# EAGLE board tempDAQ (EAGLE 8.3.0)
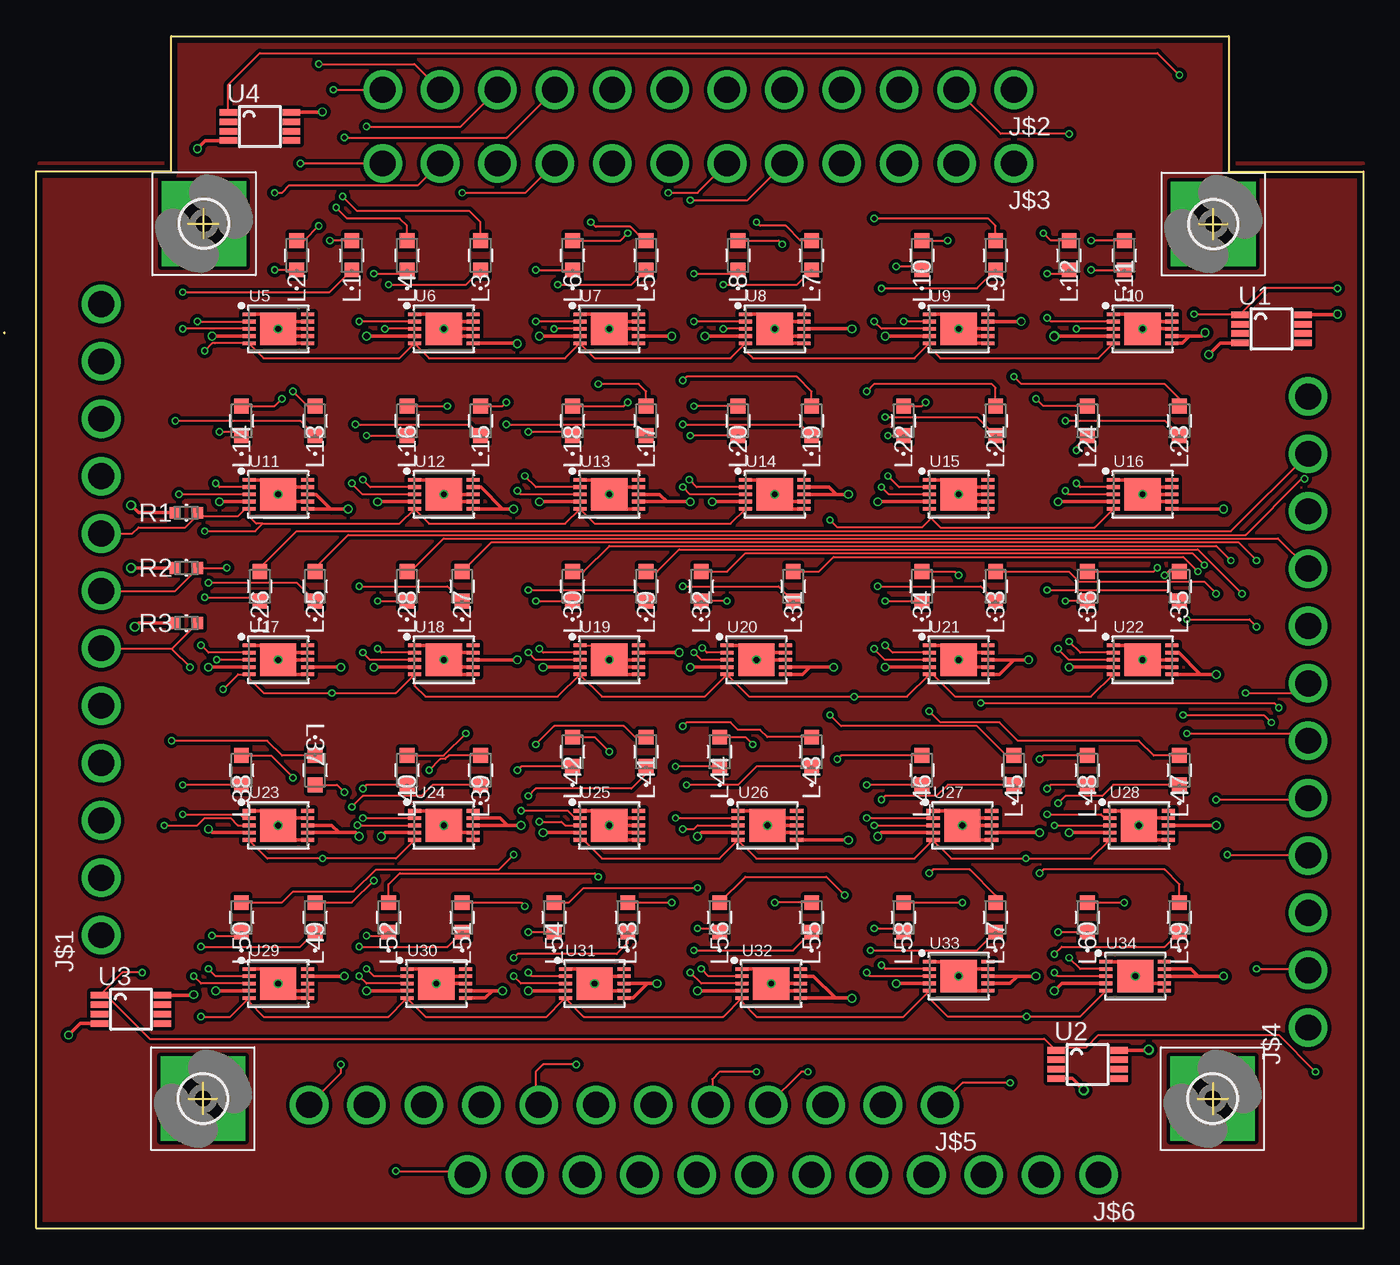
[diagram p0: board, top side]
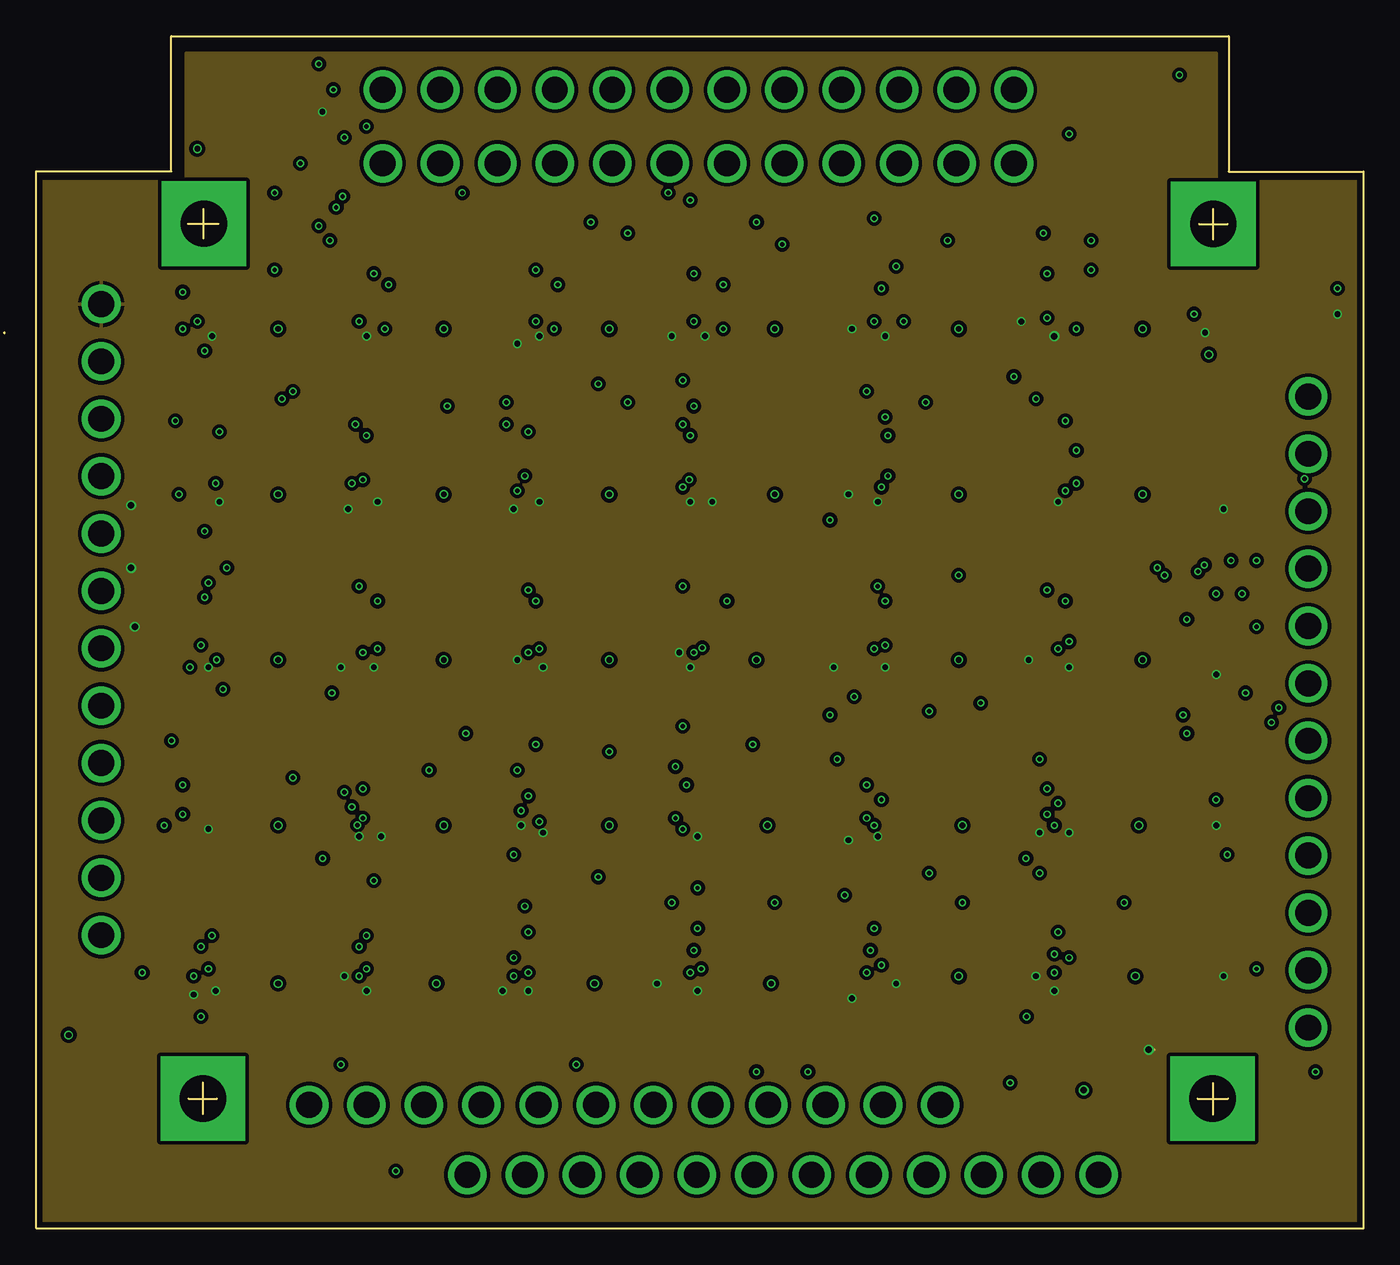
[diagram p1: board, inner layer Route2]
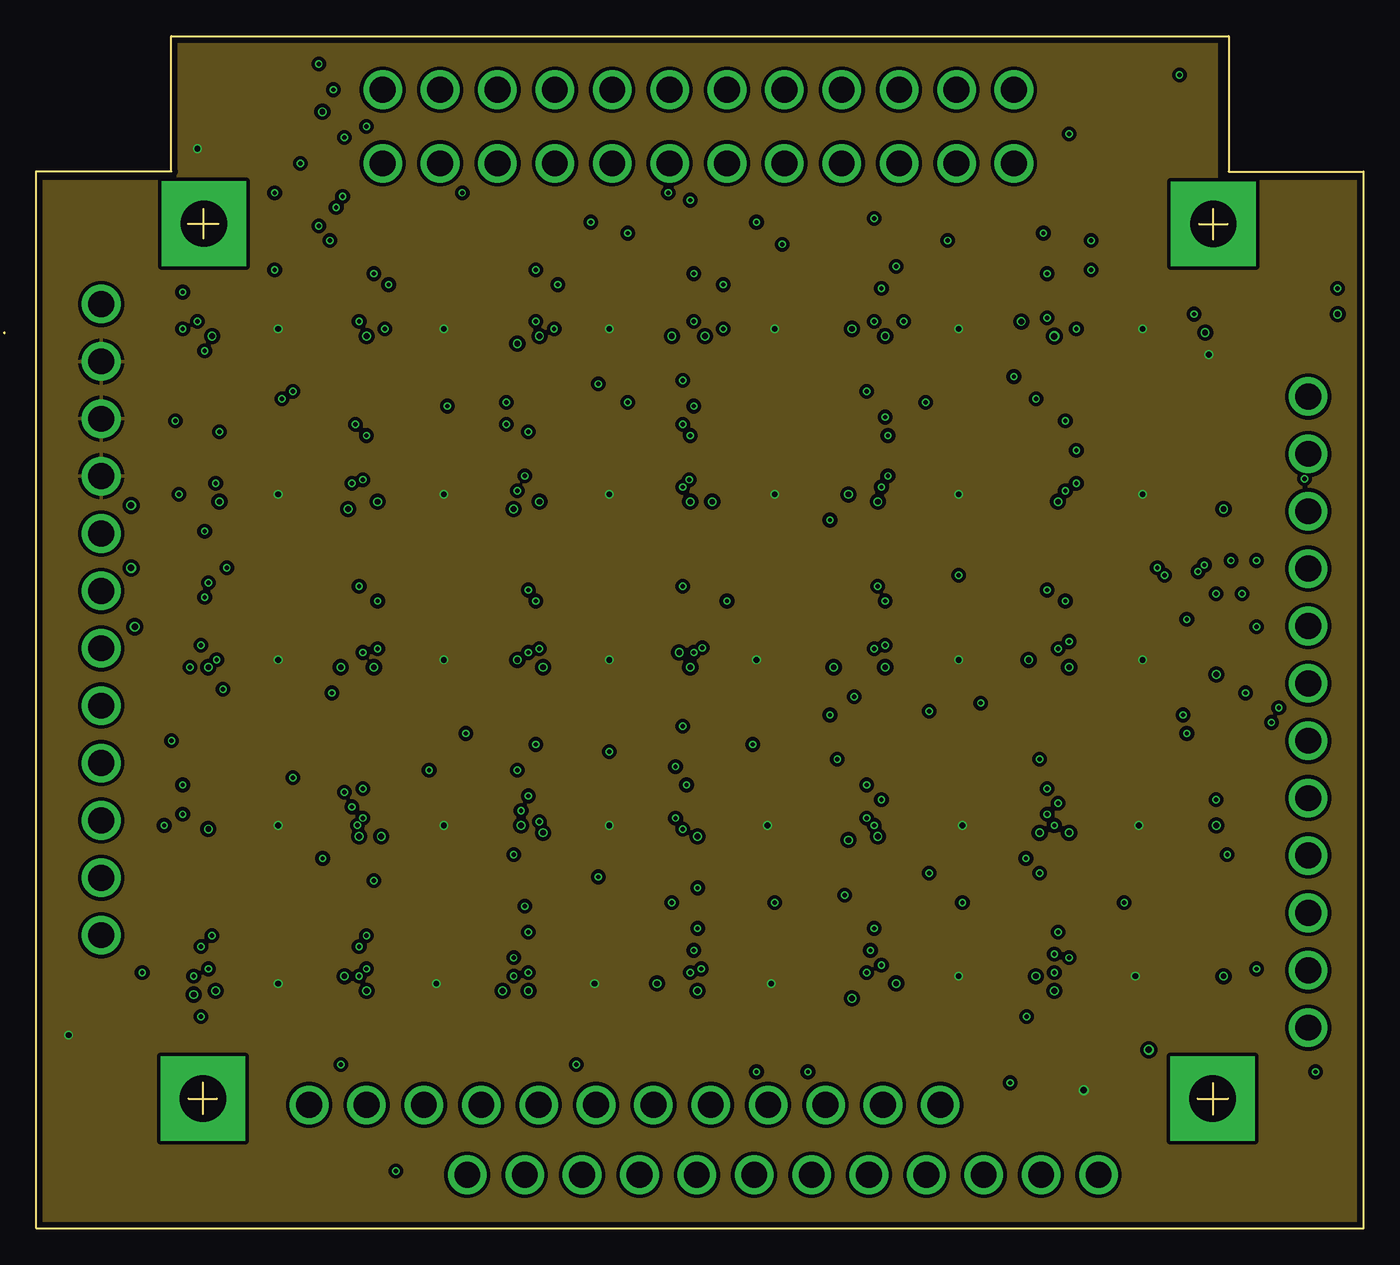
[diagram p2: board, inner layer Route15]
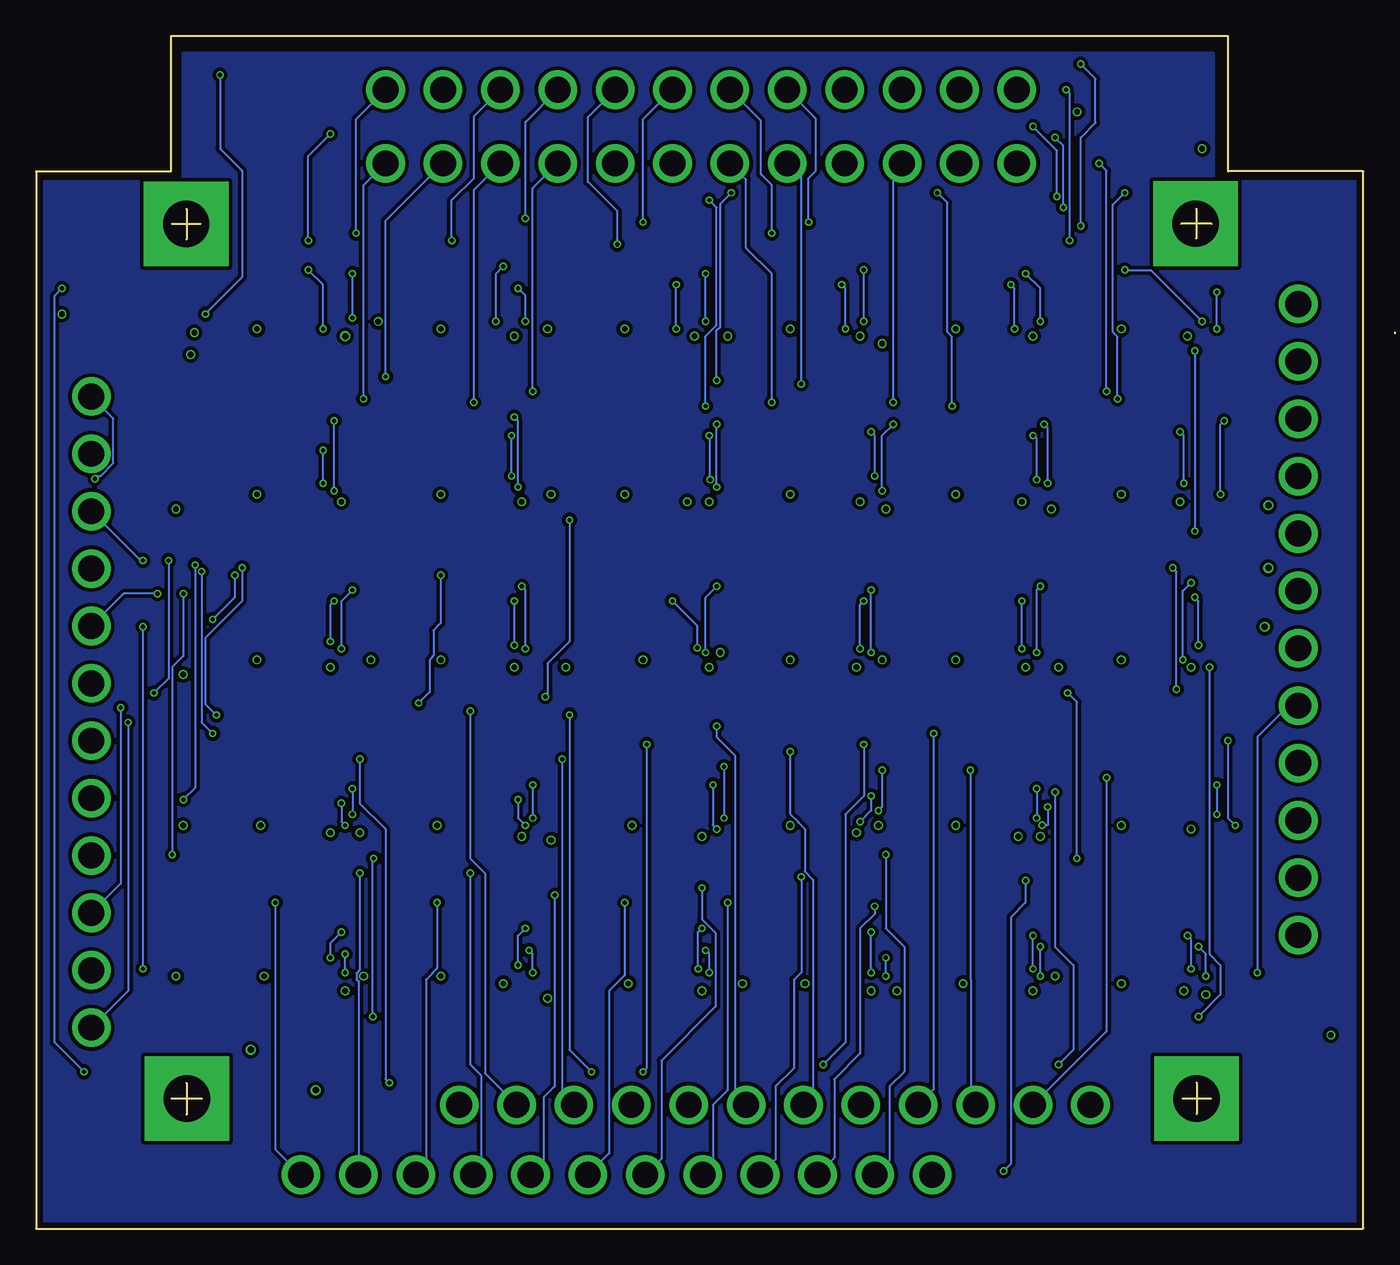
[diagram p3: board, bottom side, seen from below]

Size 91.64 x 82.35 mm. Coordinates in mm from the lower left corner, seen from the top.
Outline: 11.53,70.43 11.53,68.38
Outline: 10.49,69.39 12.6,69.39
Outline: 10.52,8.97 12.5,8.97
Outline: 11.51,10.08 11.51,7.92
Outline: 81.25,10.06 81.25,7.87
Outline: 80.19,8.97 82.3,8.97
Outline: 81.25,70.41 81.25,68.33
Outline: 80.29,69.37 82.27,69.37
Outline: 0,0.03 0,73.02 9.32,73.02 9.32,82.35 82.35,82.35 82.35,73 91.64,73 91.64,0 0.03,0 0,0.03
Copper layers (1*2*15*16): Top 0.035559375mm / dielectric 0.17018125mm / Route2 0.01778125mm / dielectric 47mil / Route15 0.01778125mm / dielectric 0.17018125mm / Bottom 0.035559375mm
Design rules "oshpark-4layer": minimum track width 5mil, minimum drill 10mil, track to track 5mil, track to pad 5mil, pad to pad 5mil, via to via 5mil, smd to smd 5mil, copper to edge 15mil, drill to drill 6mil, minimum pad ring 4mil, minimum via ring 4mil, stop-mask expansion 2.5mil, vias tented up to drill 0mil, thermal gap 10mil
Net classes: 1 power: width 0.61 mm, drill 0.406 mm, clearance 0.205 mm to class 0, clearance 0.205 mm; 2 gnd: width 0.305 mm, drill 0.406 mm, clearance 0.205 mm to class 0, clearance 0.205 mm to class 1, clearance 0.205 mm; 3 power usb: width 0.508 mm, drill 0.406 mm, clearance 0.205 mm to class 0, clearance 0.205 mm to class 1, clearance 0.205 mm to class 2, clearance 0.205 mm
Milling: 1 lines

## Footprints (pad centres in the part's own frame; a part is rotated, then mirrored left to right if it is on the bottom)
3,2-PAD-SQUARE = drill 3.2 pad 5.842 square: B3,2 0,0
WIREWRAPPOST = drill 1.778 pad 2.54: 1 0,0; 2 3.962,0; 3 7.925,0; 4 11.887,0; 5 15.85,0; 6 19.812,0; 7 23.774,0; 8 27.737,0; 9 31.699,0; 10 35.662,0; 11 39.624,0; 12 43.586,0
IND_BOURNS_MH2029 = smd 1.016 x 1.016: 1 -1.016,0; 2 1.016,0
RC0603N = smd 0.762 x 0.813: 1 -0.775,0; 2 0.775,0
SOP65P500X110-8N = smd 1.2 x 0.45: 1 -2.175,0.975; 2 -2.175,0.325; 3 -2.175,-0.325; 4 -2.175,-0.975; 5 2.175,-0.975; 6 2.175,-0.325; 7 2.175,0.325; 8 2.175,0.975
TDFN10_3X4MM = smd 0.25 x 0.9: 1 -1,-2.02; 2 -0.5,-2.02; 3 0,-2.02; 4 0.5,-2.02; 5 1,-2.02; 6 1,2.02; 7 0.5,2.02; 8 0,2.02; 9 -0.5,2.02; 10 -1,2.02 | smd 2.25 x 2.5: THERMAL 0,0

## Placement (x,y rotation side)
H1  MOUNT-PAD-SQUARE3.2  [3,2-PAD-SQUARE]  11.58,69.4 0 top
H2  MOUNT-PAD-SQUARE3.2  [3,2-PAD-SQUARE]  11.51,8.98 0 top
H3  MOUNT-PAD-SQUARE3.2  [3,2-PAD-SQUARE]  81.28,69.38 0 top
H4  MOUNT-PAD-SQUARE3.2  [3,2-PAD-SQUARE]  81.23,8.98 0 top
J$1  WIREPOST  [WIREWRAPPOST]  4.49,20.27 90 top
J$2  WIREPOST  [WIREWRAPPOST]  67.52,78.65 180 top
J$3  WIREPOST  [WIREWRAPPOST]  67.52,73.57 180 top
J$4  WIREPOST  [WIREWRAPPOST]  87.84,13.88 90 top
J$5  WIREPOST  [WIREWRAPPOST]  62.44,8.54 180 top
J$6  WIREPOST  [WIREWRAPPOST]  73.36,3.72 180 top
L1  FERRITE  [IND_BOURNS_MH2029]  21.8,67.22 90 top
L2  FERRITE  [IND_BOURNS_MH2029]  17.99,67.22 90 top
L3  FERRITE  [IND_BOURNS_MH2029]  30.69,67.22 90 top
L4  FERRITE  [IND_BOURNS_MH2029]  25.61,67.22 90 top
L5  FERRITE  [IND_BOURNS_MH2029]  42.12,67.22 90 top
L6  FERRITE  [IND_BOURNS_MH2029]  37.04,67.22 90 top
L7  FERRITE  [IND_BOURNS_MH2029]  53.55,67.22 90 top
L8  FERRITE  [IND_BOURNS_MH2029]  48.47,67.22 90 top
L9  FERRITE  [IND_BOURNS_MH2029]  66.25,67.22 90 top
L10  FERRITE  [IND_BOURNS_MH2029]  61.17,67.22 90 top
L11  FERRITE  [IND_BOURNS_MH2029]  75.14,67.22 90 top
L12  FERRITE  [IND_BOURNS_MH2029]  71.33,67.22 90 top
L13  FERRITE  [IND_BOURNS_MH2029]  19.26,55.79 90 top
L14  FERRITE  [IND_BOURNS_MH2029]  14.18,55.79 90 top
L15  FERRITE  [IND_BOURNS_MH2029]  30.69,55.79 90 top
L16  FERRITE  [IND_BOURNS_MH2029]  25.61,55.79 90 top
L17  FERRITE  [IND_BOURNS_MH2029]  42.12,55.79 90 top
L18  FERRITE  [IND_BOURNS_MH2029]  37.04,55.79 90 top
L19  FERRITE  [IND_BOURNS_MH2029]  53.55,55.79 90 top
L20  FERRITE  [IND_BOURNS_MH2029]  48.47,55.79 90 top
L21  FERRITE  [IND_BOURNS_MH2029]  66.25,55.79 90 top
L22  FERRITE  [IND_BOURNS_MH2029]  59.9,55.79 90 top
L23  FERRITE  [IND_BOURNS_MH2029]  78.95,55.79 90 top
L24  FERRITE  [IND_BOURNS_MH2029]  72.6,55.79 90 top
L25  FERRITE  [IND_BOURNS_MH2029]  19.26,44.36 90 top
L26  FERRITE  [IND_BOURNS_MH2029]  15.45,44.36 90 top
L27  FERRITE  [IND_BOURNS_MH2029]  29.42,44.36 90 top
L28  FERRITE  [IND_BOURNS_MH2029]  25.61,44.36 90 top
L29  FERRITE  [IND_BOURNS_MH2029]  42.12,44.36 90 top
L30  FERRITE  [IND_BOURNS_MH2029]  37.04,44.36 90 top
L31  FERRITE  [IND_BOURNS_MH2029]  52.28,44.36 90 top
L32  FERRITE  [IND_BOURNS_MH2029]  45.93,44.36 90 top
L33  FERRITE  [IND_BOURNS_MH2029]  66.25,44.36 90 top
L34  FERRITE  [IND_BOURNS_MH2029]  61.17,44.36 90 top
L35  FERRITE  [IND_BOURNS_MH2029]  78.95,44.36 90 top
L36  FERRITE  [IND_BOURNS_MH2029]  72.6,44.36 90 top
L37  FERRITE  [IND_BOURNS_MH2029]  19.26,31.66 270 top
L38  FERRITE  [IND_BOURNS_MH2029]  14.18,31.66 90 top
L39  FERRITE  [IND_BOURNS_MH2029]  30.69,31.66 90 top
L40  FERRITE  [IND_BOURNS_MH2029]  25.61,31.66 90 top
L41  FERRITE  [IND_BOURNS_MH2029]  42.12,32.93 90 top
L42  FERRITE  [IND_BOURNS_MH2029]  37.04,32.93 90 top
L43  FERRITE  [IND_BOURNS_MH2029]  53.55,32.93 90 top
L44  FERRITE  [IND_BOURNS_MH2029]  47.2,32.93 90 top
L45  FERRITE  [IND_BOURNS_MH2029]  67.52,31.66 90 top
L46  FERRITE  [IND_BOURNS_MH2029]  61.17,31.66 90 top
L47  FERRITE  [IND_BOURNS_MH2029]  78.95,31.66 90 top
L48  FERRITE  [IND_BOURNS_MH2029]  72.6,31.66 90 top
L49  FERRITE  [IND_BOURNS_MH2029]  19.26,21.5 90 top
L50  FERRITE  [IND_BOURNS_MH2029]  14.18,21.5 90 top
L51  FERRITE  [IND_BOURNS_MH2029]  29.42,21.5 90 top
L52  FERRITE  [IND_BOURNS_MH2029]  24.34,21.5 90 top
L53  FERRITE  [IND_BOURNS_MH2029]  40.85,21.5 90 top
L54  FERRITE  [IND_BOURNS_MH2029]  35.77,21.5 90 top
L55  FERRITE  [IND_BOURNS_MH2029]  53.55,21.5 90 top
L56  FERRITE  [IND_BOURNS_MH2029]  47.2,21.5 90 top
L57  FERRITE  [IND_BOURNS_MH2029]  66.25,21.5 90 top
L58  FERRITE  [IND_BOURNS_MH2029]  59.9,21.5 90 top
L59  FERRITE  [IND_BOURNS_MH2029]  78.95,21.5 90 top
L60  FERRITE  [IND_BOURNS_MH2029]  72.6,21.5 90 top
R1  4.7K  [RC0603N]  10.37,49.44 0 top
R2  4.7K  [RC0603N]  10.37,45.63 0 top
R3  4.7K  [RC0603N]  10.37,41.82 0 top
U1  DS18B20U+T&R  [SOP65P500X110-8N]  85.3,62.14 0 top
U2  DS18B20U+T&R  [SOP65P500X110-8N]  72.6,11.34 0 top
U3  DS18B20U+T&R  [SOP65P500X110-8N]  6.56,15.15 0 top
U4  DS18B20U+T&R  [SOP65P500X110-8N]  15.45,76.11 0 top
U5  MAX31850  [TDFN10_3X4MM]  16.72,62.14 270 top
U6  MAX31850  [TDFN10_3X4MM]  28.15,62.14 270 top
U7  MAX31850  [TDFN10_3X4MM]  39.58,62.14 270 top
U8  MAX31850  [TDFN10_3X4MM]  51.01,62.14 270 top
U9  MAX31850  [TDFN10_3X4MM]  63.71,62.14 270 top
U10  MAX31850  [TDFN10_3X4MM]  76.41,62.14 270 top
U11  MAX31850  [TDFN10_3X4MM]  16.72,50.71 270 top
U12  MAX31850  [TDFN10_3X4MM]  28.15,50.71 270 top
U13  MAX31850  [TDFN10_3X4MM]  39.58,50.71 270 top
U14  MAX31850  [TDFN10_3X4MM]  51.01,50.71 270 top
U15  MAX31850  [TDFN10_3X4MM]  63.71,50.71 270 top
U16  MAX31850  [TDFN10_3X4MM]  76.41,50.71 270 top
U17  MAX31850  [TDFN10_3X4MM]  16.72,39.28 270 top
U18  MAX31850  [TDFN10_3X4MM]  28.15,39.28 270 top
U19  MAX31850  [TDFN10_3X4MM]  39.58,39.28 270 top
U20  MAX31850  [TDFN10_3X4MM]  49.74,39.28 270 top
U21  MAX31850  [TDFN10_3X4MM]  63.71,39.28 270 top
U22  MAX31850  [TDFN10_3X4MM]  76.41,39.28 270 top
U23  MAX31850  [TDFN10_3X4MM]  16.72,27.85 270 top
U24  MAX31850  [TDFN10_3X4MM]  28.15,27.85 270 top
U25  MAX31850  [TDFN10_3X4MM]  39.58,27.85 270 top
U26  MAX31850  [TDFN10_3X4MM]  50.5,27.85 270 top
U27  MAX31850  [TDFN10_3X4MM]  63.96,27.85 270 top
U28  MAX31850  [TDFN10_3X4MM]  76.15,27.85 270 top
U29  MAX31850  [TDFN10_3X4MM]  16.72,16.93 270 top
U30  MAX31850  [TDFN10_3X4MM]  27.64,16.93 270 top
U31  MAX31850  [TDFN10_3X4MM]  38.56,16.93 270 top
U32  MAX31850  [TDFN10_3X4MM]  50.75,16.93 270 top
U33  MAX31850  [TDFN10_3X4MM]  63.71,17.43 270 top
U34  MAX31850  [TDFN10_3X4MM]  75.9,17.43 270 top

## Library data of the parts
H1-H4 = holes
J$1-J$6 = cubesat
L1-L60 = cubesat_; MANUFACTURER_PART_NUMBER: MH2029300Y; VENDOR: Bourns Electronics
R1-R3 = cubesat_
U1-U4 = cubesat_; AVAILABILITY: Good; DESCRIPTION: Temp Sensor Digital Serial (1-Wire) 8-Pin uMAX T/R; MF: Maxim Integrated; MP: DS18B20U+T&amp;R; PACKAGE: MSOP-8 Maxim Integrated; PRICE: 2.79 USD
U5-U34 = microbuilder

## Nets
3.3V: J$1.12 R1.1 R2.1 R3.1 U1.8 U2.8 U3.8 U4.8 U5.4 U6.4 U6.6 U7.4 U7.7 U8.4 U8.8 U9.4 U9.9 U10.4 U10.6 U10.7 U11.4 U11.6 U11.8 U12.4 U12.6 U12.9 U13.4 U13.7 U13.8 U14.4 U14.8 U14.9 U15.4 U16.4 U16.6 U17.4 U17.7 U18.4 U18.8 U19.4 U19.9 U20.4 U20.6 U20.7 U21.4 U21.6 U21.8 U22.4 U22.6 U22.9 U23.4 U23.7 U23.8 U24.4 U24.8 U24.9 U25.4 U26.4 U26.6 U27.4 U27.7 U28.4 U28.8 U29.4 U29.9 U30.4 U30.6 U30.7 U31.4 U31.6 U31.8 U32.4 U32.6 U32.9 U33.4 U33.7 U33.8 U34.4 U34.8 U34.9
DATA1: J$1.8 R1.2 U5.5 U6.5 U7.5 U8.5 U9.5 U10.5 U11.5 U12.5 U13.5 U14.5
DATA2: J$1.7 R2.2 U15.5 U16.5 U17.5 U18.5 U19.5 U20.5 U21.5 U22.5 U23.5 U24.5
DATA3: J$1.6 R3.2 U25.5 U26.5 U27.5 U28.5 U29.5 U30.5 U31.5 U32.5 U33.5 U34.5
GND [gnd]: J$1.9 J$1.10 J$1.11 U1.4 U2.4 U3.4 U4.4 U5.1 U5.6 U5.7 U5.8 U5.9 U5.THERMAL U6.1 U6.7 U6.8 U6.9 U6.THERMAL U7.1 U7.6 U7.8 U7.9 U7.THERMAL U8.1 U8.6 U8.7 U8.9 U8.THERMAL U9.1 U9.6 U9.7 U9.8 U9.THERMAL U10.1 U10.8 U10.9 U10.THERMAL U11.1 U11.7 U11.9 U11.THERMAL U12.1 U12.7 U12.8 U12.THERMAL U13.1 U13.6 U13.9 U13.THERMAL U14.1 U14.6 U14.7 U14.THERMAL U15.1 U15.6 U15.7 U15.8 U15.9 U15.THERMAL U16.1 U16.7 U16.8 U16.9 U16.THERMAL U17.1 U17.6 U17.8 U17.9 U17.THERMAL U18.1 U18.6 U18.7 U18.9 U18.THERMAL U19.1 U19.6 U19.7 U19.8 U19.THERMAL U20.1 U20.8 U20.9 U20.THERMAL U21.1 U21.7 U21.9 U21.THERMAL U22.1 U22.7 U22.8 U22.THERMAL U23.1 U23.6 U23.9 U23.THERMAL U24.1 U24.6 U24.7 U24.THERMAL U25.1 U25.6 U25.7 U25.8 U25.9 U25.THERMAL U26.1 U26.7 U26.8 U26.9 U26.THERMAL U27.1 U27.6 U27.8 U27.9 U27.THERMAL U28.1 U28.6 U28.7 U28.9 U28.THERMAL U29.1 U29.6 U29.7 U29.8 U29.THERMAL U30.1 U30.8 U30.9 U30.THERMAL U31.1 U31.7 U31.9 U31.THERMAL U32.1 U32.7 U32.8 U32.THERMAL U33.1 U33.6 U33.9 U33.THERMAL U34.1 U34.6 U34.7 U34.THERMAL
N$1: L21.1 U15.3
N$2: L22.1 U15.2
N$3: L23.1 U16.3
N$4: L24.1 U16.2
N$5: L26.1 U17.2
N$6: L25.1 U17.3
N$7: L27.1 U18.3
N$8: L28.1 U18.2
N$9: L29.1 U19.3
N$10: L30.1 U19.2
N$11: L31.1 U20.3
N$12: L32.1 U20.2
N$13: L33.1 U21.3
N$14: L34.1 U21.2
N$15: L35.1 U22.3
N$16: L36.1 U22.2
N$17: L1.1 U5.3
N$18: L37.1 U23.3
N$19: L38.1 U23.2
N$20: L39.1 U24.3
N$21: L40.1 U24.2
N$22: L2.1 U5.2
N$23: L3.1 U6.3
N$24: L4.1 U6.2
N$25: L6.1 U7.2
N$26: L5.1 U7.3
N$27: L7.1 U8.3
N$28: L8.1 U8.2
N$29: L9.1 U9.3
N$30: L10.1 U9.2
N$31: L11.1 U10.3
N$32: L12.1 U10.2
N$33: L13.1 U11.3
N$34: L14.1 U11.2
N$35: L15.1 U12.3
N$36: L16.1 U12.2
N$37: L17.1 U13.3
N$38: L18.1 U13.2
N$39: L19.1 U14.3
N$40: L20.1 U14.2
N$41: L41.1 U25.3
N$42: L42.1 U25.2
N$43: L43.1 U26.3
N$44: L44.1 U26.2
N$45: L46.1 U27.2
N$46: L45.1 U27.3
N$47: L47.1 U28.3
N$48: L48.1 U28.2
N$49: L49.1 U29.3
N$50: L50.1 U29.2
N$51: L51.1 U30.3
N$52: L52.1 U30.2
N$53: L53.1 U31.3
N$54: L54.1 U31.2
N$55: L55.1 U32.3
N$56: L56.1 U32.2
N$57: L57.1 U33.3
N$58: L58.1 U33.2
N$59: L59.1 U34.3
N$60: L60.1 U34.2
T1+: J$2.12 L1.2
T1-: J$2.11 L2.2
T2+: J$2.10 L3.2
T2-: J$2.9 L4.2
T3+: J$2.8 L5.2
T3-: J$2.7 L6.2
T4+: J$2.6 L7.2
T4-: J$2.5 L8.2
T5+: J$2.4 L9.2
T5-: J$2.3 L10.2
T6+: J$2.2 L11.2
T6-: J$2.1 L12.2
T7+: J$3.12 L13.2
T7-: J$3.11 L14.2
T8+: J$3.10 L15.2
T8-: J$3.9 L16.2
T9+: J$3.8 L17.2
T9-: J$3.7 L18.2
T10+: J$3.6 L19.2
T10-: J$3.5 L20.2
T11+: J$3.4 L21.2
T11-: J$3.3 L22.2
T12+: J$3.2 L23.2
T12-: J$3.1 L24.2
T13+: J$4.12 L25.2
T13-: J$4.11 L26.2
T14+: J$4.10 L27.2
T14-: J$4.9 L28.2
T15+: J$4.8 L29.2
T15-: J$4.7 L30.2
T16+: J$4.6 L31.2
T16-: J$4.5 L32.2
T17+: J$4.4 L33.2
T17-: J$4.3 L34.2
T18+: J$4.2 L35.2
T18-: J$4.1 L36.2
T19+: J$5.12 L37.2
T19-: J$5.11 L38.2
T20+: J$5.10 L39.2
T20-: J$5.9 L40.2
T21+: J$5.8 L41.2
T21-: J$5.7 L42.2
T22+: J$5.6 L43.2
T22-: J$5.5 L44.2
T23+: J$5.4 L45.2
T23-: J$5.3 L46.2
T24+: J$5.2 L47.2
T24-: J$5.1 L48.2
T25+: J$6.12 L49.2
T25-: J$6.11 L50.2
T26+: J$6.10 L51.2
T26-: J$6.9 L52.2
T27+: J$6.8 L53.2
T27-: J$6.7 L54.2
T28+: J$6.6 L55.2
T28-: J$6.5 L56.2
T29+: J$6.4 L57.2
T29-: J$6.3 L58.2
T30+: J$6.2 L59.2
T30-: J$6.1 L60.2
TEMP: J$1.5 U1.1 U2.1 U3.1 U4.1

## Tracks (layer width: path | path; a pad name or v marks a point on that pad's centre or on a via)
3.3V  (via drill 0.4, 0.45)
  Top 0.254: U3.8 10.83,16.12 v10.87,16.16 | U29.9 21.28,17.43 v21.29,17.43 | U4.8 19.72,77.08 v19.76,77.12 | U1.8 89.83,63.11 v89.87,63.15 | U30.4 v22.82,16.43 v22.81,16.42 | U29.4 v12.41,16.43 v12.4,16.42 | 31.51,16.43 U30.7 | 31.51,16.43 v32.2,16.43 v32.21,16.42 | U30.6 31.01,15.93 31.51,16.43 | U31.4 v34,16.43 v33.99,16.42 | 42.21,16.93 U31.8 | 42.21,16.93 v42.88,16.93 | U31.6 41.21,15.93 42.21,16.93 | U32.4 v45.68,16.43 v45.67,16.42 | 55.18,15.93 U32.6 | 55.18,15.93 56.32,15.93 v56.34,15.91 | U32.9 53.68,17.43 55.18,15.93 | 67.75,17.43 U33.8 | 67.75,17.43 v69.04,17.43 | U33.7 67.25,16.93 67.75,17.43 | U33.4 v59.4,16.93 v59.39,16.93 | 80.24,17.43 U34.8 | 80.24,17.43 v81.99,17.43 | U34.9 79.74,17.93 80.24,17.43 | 20.91,27.35 U23.7 | 20.91,27.35 22.04,27.35 v22.3,27.09 | U23.8 20.41,27.85 20.91,27.35 | U23.4 12.14,27.35 v11.89,27.59 | U24.4 24.09,27.35 v23.83,27.09 | 32.55,27.85 U24.8 | 32.55,27.85 v33.48,27.85 | U24.9 32.05,28.35 32.55,27.85 | U25.4 v35.01,27.35 v35,27.34 | U26.4 45.93,27.35 v45.67,27.09 | U26.6 56.07,26.85 v56.09,26.83 | U27.4 58.38,27.35 v58.12,27.09 | U27.7 v69.29,27.35 v69.29,27.34 | U28.4 v71.33,27.35 v71.33,27.34 | U28.8 v81.49,27.85 | U22.4 v71.33,38.78 v71.33,38.77 | 80.41,38.28 U22.6 | 80.41,38.28 81.47,38.28 v81.49,38.26 | U22.9 78.91,39.78 80.41,38.28 | 67.52,39.28 U21.8 | 67.52,39.28 v68.53,39.28 | U21.6 66.52,38.28 67.52,39.28 | U21.4 v58.63,38.78 v58.63,38.77 | 53.42,38.78 U20.7 | 53.42,38.78 v55.06,38.78 v55.07,38.77 | U20.6 52.92,38.28 53.42,38.78 | U19.9 44.39,39.78 v44.4,39.79 | U20.4 v45.17,38.78 v45.16,38.77 | U19.4 v35.01,38.78 v35,38.77 | U18.8 v33.23,39.28 | U18.4 23.33,38.78 v23.32,38.77 | U17.7 v21.03,38.78 v21.03,38.77
  Top 0.254: U17.4 11.9,38.78 v11.89,38.77 | U11.4 v12.66,50.21 v12.65,50.2 | 20.32,49.71 U11.6 | 20.32,49.71 21.53,49.71 v21.54,49.69 | U11.8 19.32,50.71 20.32,49.71 | U12.4 v23.58,50.21 v23.57,50.2 | 32.21,49.71 U12.6 | 32.21,49.71 32.96,49.71 v32.97,49.69 | U12.9 30.71,51.21 32.21,49.71 | U13.4 34.76,50.21 v34.75,50.2 | 43.55,50.21 U13.7 | 43.55,50.21 v45.16,50.21 v45.16,50.2 | U13.8 43.05,50.71 43.55,50.21 | U14.4 v46.7,50.21 v46.69,50.2 | 55.25,50.71 U14.8 | 55.25,50.71 v56.09,50.71 | U14.9 54.75,51.21 55.25,50.71 | U15.4 v58.13,50.21 v58.12,50.2 | U16.4 v70.57,50.21 v70.56,50.2 | U16.6 81.98,49.71 v81.99,49.69 | 79.64,61.64 U10.7 | 79.64,61.64 80.48,61.64 v80.72,61.88 | U10.6 79.14,61.14 79.64,61.64 | U8.8 v56.34,62.14 | U9.4 v58.63,61.64 v58.63,61.63 | U9.9 v68.02,62.64 v68.02,62.65 | U8.4 46.19,61.64 v46.18,61.63 | U7.7 v43.89,61.64 v43.89,61.63 | U7.4 34.76,61.64 v34.75,61.63 | U6.6 33.21,61.14 v33.23,61.12 | U6.4 v22.82,61.64 v22.81,61.63 | U5.4 v12.15,61.64 v12.14,61.63 | U10.4 72.05,61.64 72.04,61.63 v70.31,61.63 | U34.4 70.83,16.93 v70.31,16.42 | U2.8 76.79,12.31 v76.83,12.35 | R3.1 7.06,41.82 v6.81,41.56 | R2.1 v6.56,45.63 | R1.1 7.06,49.44 v6.56,49.95
  Route2 0.254: v76.83,12.35 77.17,12.35
  pour Route2 (isolate 0.254): 0.21,-0.09 91.65,-0.09 91.65,72.3 81.49,72.3 81.49,81.19 10.37,81.19 10.37,72.3 0.21,72.3
DATA1  (via drill 0.3)
  Top 0.127: U10.5 73.35,60.11 62.44,60.11 61.69,60.86 U9.5 60.65,60.11 49.48,60.11 48.99,60.6 U8.5 47.95,60.11 38.56,60.11 37.56,61.11 U7.5 36.52,60.11 27.13,60.11 26.13,61.11 U6.5 25.09,60.11 15.7,60.11 14.7,61.11 U5.5 12.35,61.14 | 11.23,49.35 11.39,49.18 13.92,49.18 14.45,49.71 U11.5 14.7,49.17 15.19,48.68 15.64,48.68 | 11.23,49.35 R1.2 | 15.64,48.68 25.09,48.68 U12.5 26.13,49.68 27.13,48.68 36.52,48.68 U13.5 37.56,49.68 38.56,48.68 47.95,48.68 U14.5 49.21,49.71 | 12.35,61.14 | 12.35,61.14 12.16,61.14 v11.64,60.61 | v11.64,48.17 15.13,48.17 15.64,48.68 | J$1.8 6.64,48 7.06,48.42 10.3,48.42 11.23,49.35
  Bottom 0.127: v11.64,60.61 v11.64,48.17
DATA2  (via drill 0.3)
  Top 0.127: U15.5 61.69,49.17 | 61.69,49.17 62.44,48.42 73.1,48.42 U16.5 | v12.91,37.25 13.94,38.28 U17.5 14.7,38 15.7,36.99 v20.41,36.99 24.84,36.99 U18.5 26.13,37.49 26.88,36.74 36.02,36.74 U19.5 37.56,38.25 39.07,36.74 46.18,36.74 47.57,38.14 | 11.2,45.63 v13.16,45.63 | 11.2,45.63 R2.2 | 47.57,38.14 U20.5 | 47.57,38.14 47.83,38.14 49.23,36.74 v56.48,36.74 60.15,36.74 U21.5 61.91,38.28 63.45,36.74 72.85,36.74 U22.5 | U23.5 14.7,26.82 15.95,25.56 v19.77,25.56 24.84,25.56 U24.5 26.13,26.82 | J$1.7 9.61,44.04 11.2,45.63 | 61.69,49.17 61.69,48.94 61.17,48.42 55.32,48.42 v54.82,48.93
  Bottom 0.127: v12.91,37.25 12.91,45.37 v13.16,45.63 | v54.82,48.93 54.82,40.55 56.34,39.02 56.34,36.88 v56.48,36.74 | v19.77,25.56 19.77,36.35 v20.41,36.99
DATA3  (via drill 0.3)
  Top 0.127: U25.5 37.78,26.85 39.07,25.56 47.19,25.56 U26.5 48.48,26.82 49.74,25.56 60.65,25.56 U27.5 61.94,26.82 63.2,25.56 v68.34,25.56 72.85,25.56 U28.5 | 25.48,15.78 24.33,14.64 15.7,14.64 14.7,15.64 U29.5 13.41,14.64 v11.38,14.64 | 25.48,15.78 U30.5 | 25.48,15.78 25.73,15.78 26.88,14.64 35.25,14.64 36.4,15.78 | 36.4,15.78 U31.5 | 36.4,15.78 36.65,15.78 37.8,14.64 47.45,14.64 U32.5 48.73,15.64 49.74,14.64 59.89,14.64 U33.5 61.69,15.9 62.94,14.64 v68.4,14.64 72.08,14.64 U34.5 | J$1.6 9.4,40.08 | 9.4,40.08 R3.2 | 9.4,40.08 9.4,39.99 v10.62,38.77
  Bottom 0.127: v68.4,14.64 68.4,25.5 v68.34,25.56 | v10.62,38.77 10.62,18.96 9.86,18.2 9.86,16.16 v11.38,14.64
GND  (via drill 0.4, 0.45)
  Top 0.127: U19.1 38.58,40.28 U19.THERMAL
  Top 0.254: U3.4 3.04,14.17 v2.24,13.37 | U29.7 U29.6 17.72,15.93 16.55,17.1 | U29.7 U29.8 | U4.4 11.68,75.13 v11.13,74.58 | U1.4 81.78,61.16 v80.98,60.36 | U29.1 15.72,17.93 16.45,17.19 | 16.55,17.1 16.45,17.19 | 16.55,17.1 U29.THERMAL | 16.55,17.1 16.45,17.19 | U29.7 17.22,16.43 16.55,17.1 | U30.1 26.64,17.93 27.5,17.06 | 27.5,17.06 U30.THERMAL U30.8 | U30.9 27.87,17.43 27.5,17.06 | U31.1 37.56,17.93 U31.THERMAL | U31.9 39.06,17.43 U31.THERMAL | U31.7 39.06,16.43 U31.THERMAL | U32.1 49.75,17.93 U32.THERMAL 50.77,16.93 | 50.77,16.93 U32.8 | U32.7 51.27,16.43 50.77,16.93 | U33.6 64.71,16.43 63.83,17.31 | 63.83,17.31 63.8,17.34 | 63.8,17.34 U33.THERMAL | U33.1 62.71,18.43 63.8,17.34 | U33.9 64.46,17.93 63.83,17.31 | U34.1 74.9,18.43 75.86,17.47 | 75.86,17.47 U34.THERMAL | 75.86,17.47 76.4,16.93 U34.7 U34.6 | U23.1 15.72,28.85 U23.THERMAL | U23.9 17.22,28.35 U23.THERMAL | U23.6 17.72,26.85 U23.THERMAL | U24.1 27.15,28.85 U24.THERMAL 28.65,27.35 U24.7 U24.6 | U25.1 38.58,28.85 39.46,27.96 | 39.46,27.96 39.5,27.92 | 39.5,27.92 U25.THERMAL | U25.6 40.58,26.85 39.5,27.92 | U25.7 40.08,27.35 39.5,27.92 | 39.8,27.85 U25.8 | 39.8,27.85 U25.THERMAL | U25.THERMAL 39.46,27.96 | U25.9 40.3,28.35 39.8,27.85 | U26.1 49.5,28.85 U26.THERMAL | U26.9 51,28.35 U26.THERMAL | U26.8 U26.THERMAL | U26.7 51,27.35 U26.THERMAL | U27.1 62.96,28.85 U27.THERMAL | U27.6 64.96,26.85 U27.THERMAL | 64.14,27.85 U27.8 | 64.14,27.85 U27.THERMAL | U27.9 64.64,28.35 64.14,27.85 | U28.1 75.15,28.85 76.09,27.91 | 76.09,27.91 U28.THERMAL 76.2,27.89 | U28.9 76.65,28.35 76.2,27.89 | U28.7 76.74,27.35 76.2,27.89 | U28.6 77.15,26.85 76.09,27.91 | U22.1 75.41,40.28 U22.THERMAL | U22.THERMAL U22.8
  Top 0.254: U22.7 76.91,38.78 U22.THERMAL | U21.1 62.71,40.28 63.65,39.33 | 63.65,39.33 U21.THERMAL 64.21,38.78 U21.7 | U21.9 64.1,39.78 63.65,39.33 | 49.78,39.28 U20.8 | 49.78,39.28 U20.THERMAL 48.74,40.28 U20.1 | U20.9 50.28,39.78 49.78,39.28 | U19.6 40.58,38.28 39.81,39.04 | 39.81,39.04 U19.THERMAL U19.8 | U19.7 40.08,38.78 39.81,39.04 | U18.7 28.65,38.78 28.32,39.1 | 28.32,39.1 28.24,39.18 | 28.24,39.18 U18.THERMAL | U18.9 28.84,39.78 28.34,39.28 | 28.34,39.28 28.24,39.18 | U18.6 29.15,38.28 28.32,39.1 | U18.1 27.35,40.28 28.34,39.28 | U17.6 17.72,38.28 U17.THERMAL | U17.8 U17.THERMAL | U17.9 17.22,39.78 U17.THERMAL | U17.1 15.72,40.28 U17.THERMAL | U11.1 15.72,51.71 16.62,50.81 | 16.62,50.81 U11.THERMAL | U11.9 17.02,51.21 16.62,50.81 | U11.7 17.22,50.21 16.62,50.81 | U12.1 27.15,51.71 28,50.85 | 28.04,50.82 28,50.85 | 28.04,50.82 U12.THERMAL | U12.8 U12.THERMAL | U12.THERMAL 28.04,50.82 | 28.04,50.82 28,50.85 | U12.7 28.65,50.21 28.04,50.82 | U13.1 38.58,51.71 U13.THERMAL | U13.9 40.08,51.21 U13.THERMAL | U13.6 40.58,49.71 U13.THERMAL | U14.1 50.01,51.71 U14.THERMAL | U14.6 52.01,49.71 U14.THERMAL | U14.7 51.51,50.21 U14.THERMAL | U15.THERMAL U15.8 | U15.7 64.21,50.21 63.75,50.66 | 63.75,50.66 U15.THERMAL | U15.6 64.71,49.71 63.75,50.66 | U15.9 64.21,51.21 U15.THERMAL | U15.1 62.71,51.71 63.75,50.66 | U16.1 75.41,51.71 U16.THERMAL | U16.9 76.91,51.21 U16.THERMAL | 76.51,50.71 U16.8 | 76.51,50.71 U16.THERMAL | U16.7 77.01,50.21 76.51,50.71 | U10.1 75.41,63.14 76.31,62.23 | 76.31,62.23 U10.THERMAL U10.8 | U10.9 76.72,62.64 76.31,62.23 | U9.1 62.71,63.14 U9.THERMAL 63.86,61.99 | U9.6 64.71,61.14 63.95,61.89 | 63.86,61.99 63.95,61.89 | U9.7 64.21,61.64 63.95,61.89
  Top 0.254: U9.8 64.01,62.14 63.86,61.99 | U8.7 51.51,61.64 51.09,62.05 | 51.09,62.05 U8.THERMAL 51.04,62.17 | U8.6 52.01,61.14 51.09,62.05 | U8.9 51.51,62.64 51.04,62.17 | U8.1 50.07,63.14 51.04,62.17 | U7.1 38.58,63.14 39.43,62.28 | 39.43,62.28 39.53,62.19 | 39.56,62.15 39.53,62.19 | 39.56,62.15 U7.THERMAL | U7.8 U7.THERMAL | U7.THERMAL 39.56,62.15 | 39.56,62.15 39.53,62.19 | U7.9 39.78,62.64 39.43,62.28 | U7.6 40.58,61.14 39.56,62.15 | U6.1 27.15,63.14 28,62.28 | 28,62.28 U6.THERMAL | 28.32,62.14 U6.8 | 28.23,62.14 28.32,62.14 | 28.23,62.14 U6.THERMAL | U6.THERMAL 28,62.28 | U6.7 28.82,61.64 28.32,62.14 | U6.9 28.73,62.64 28.23,62.14 | U5.7 17.22,61.64 U5.THERMAL | U5.6 17.72,61.14 U5.THERMAL | U5.8 U5.THERMAL | U5.9 17.22,62.64 U5.THERMAL | U5.1 15.72,63.14 U5.THERMAL | U2.4 71.54,10.36 v72.34,9.56
  other vias: 76.41,62.14 63.71,62.14 51.01,62.14 39.58,62.14 39.58,50.71 51.01,50.71 63.71,50.71 76.41,50.71 28.15,62.14 16.72,62.14 16.72,50.71 28.15,50.71 16.72,39.28 16.72,27.85 28.15,39.28 39.58,39.28 49.74,39.28 63.71,39.28 63.96,27.85 16.72,16.93 27.64,16.93 28.15,27.85 39.58,27.85 38.56,16.93 50.75,16.93 50.5,27.85 63.71,17.43 75.9,17.43 76.15,27.85 76.41,39.28
  pour Route15 (isolate 0.254): 0.21,-0.09 91.65,-0.09 91.65,72.3 81.49,72.3 81.49,82.46 9.1,82.46 9.1,72.3 0.21,72.3
N$1  (via drill 0.3)
  Top 0.127: U15.3 58.88,50.71 v58.37,51.22 | v58.63,56.04 64.98,56.04 L21.1
  Bottom 0.127: v58.37,51.22 58.37,55.79 v58.63,56.04
N$2  (via drill 0.3)
  Top 0.127: U15.2 59.58,51.21 v58.81,51.98 | v58.81,54.77 L22.1
  Bottom 0.127: v58.81,51.98 v58.81,54.77
N$3  (via drill 0.3)
  Top 0.127: U16.3 71.33,50.71 v71.07,50.96 | v71.07,55.79 77.93,55.79 L23.1
  Bottom 0.127: v71.07,50.96 v71.07,55.79
N$4  (via drill 0.3)
  Top 0.127: U16.2 72.1,51.21 v71.83,51.47 | v71.83,53.76 71.83,54.01 L24.1
  Bottom 0.127: v71.83,51.47 v71.83,53.76
N$5  (via drill 0.3)
  Top 0.127: U17.2 11.9,39.78 v11.38,40.29 | v11.64,43.6 15.19,43.6 L26.1
  Bottom 0.127: v11.38,40.29 11.38,43.34 v11.64,43.6
N$6  (via drill 0.3)
  Top 0.127: U17.3 v12.47,39.28 v12.46,39.28 | v11.89,44.61 17.99,44.61 L25.1
  Bottom 0.127: v12.46,39.28 12.46,44.04 v11.89,44.61
N$7  (via drill 0.3)
  Top 0.127: U18.3 23.07,39.28 v22.56,39.79 | v22.3,44.36 28.4,44.36 L27.1
  Bottom 0.127: v22.56,39.79 22.56,44.1 v22.3,44.36
N$8  (via drill 0.3)
  Top 0.127: U18.2 23.84,39.78 v23.57,40.04 | v23.57,43.34 L28.1
  Bottom 0.127: v23.57,40.04 v23.57,43.34
N$9  (via drill 0.3)
  Top 0.127: U19.3 34.5,39.28 v33.99,39.79 | v33.99,44.1 41.35,44.1 L29.1
  Bottom 0.127: v33.99,39.79 v33.99,44.1
N$10  (via drill 0.3)
  Top 0.127: U19.2 35.01,39.78 v34.75,40.04 | v34.5,43.34 L30.1
  Bottom 0.127: v34.75,40.04 34.75,43.09 v34.5,43.34
N$11  (via drill 0.3)
  Top 0.127: U20.3 45.93,39.28 v45.42,39.79 | v44.66,44.36 51.26,44.36 L31.1
  Bottom 0.127: v45.42,39.79 45.42,43.6 v44.66,44.36
N$12  (via drill 0.3)
  Top 0.127: U20.2 46.32,39.78 v45.99,40.1 | v47.7,43.34 L32.1
  Bottom 0.127: v45.99,40.1 45.99,41.63 v47.7,43.34
N$13  (via drill 0.3)
  Top 0.127: U21.3 58.63,39.28 v57.86,40.04 | v58.12,44.36 65.23,44.36 L33.1
  Bottom 0.127: v57.86,40.04 57.86,44.1 v58.12,44.36
N$14  (via drill 0.3)
  Top 0.127: U21.2 59.14,39.78 v58.63,40.29 | v58.63,43.34 L34.1
  Bottom 0.127: v58.63,40.29 v58.63,43.34
N$15  (via drill 0.3)
  Top 0.127: U22.3 71.33,39.28 v70.56,40.04 | v69.8,44.1 78.18,44.1 L35.1
  Bottom 0.127: v70.56,40.04 70.56,43.34 v69.8,44.1
N$16  (via drill 0.3)
  Top 0.127: U22.2 72.1,39.78 v71.33,40.55 | L36.1 v71.07,43.34
  Bottom 0.127: v71.33,40.55 71.33,43.09 v71.07,43.34
N$17  (via drill 0.3)
  Top 0.127: U5.3 v10.11,62.14 | v10.11,64.68 20.27,64.68 L1.1
  Bottom 0.127: v10.11,62.14 v10.11,64.68
N$18  (via drill 0.3)
  Top 0.127: L37.1 16.97,32.67 15.95,33.69 v9.35,33.69 | v8.84,27.85 11.13,27.85 11.64,28.36 13.41,28.36 13.92,27.85 U23.3
  Bottom 0.127: v9.35,33.69 9.35,28.36 v8.84,27.85
N$19  (via drill 0.3)
  Top 0.127: L38.1 v10.11,30.64 | v10.11,28.61 14.09,28.61 14.25,28.45 14.59,28.45 U23.2
  Bottom 0.127: v10.11,30.64 v10.11,28.61
N$20  (via drill 0.3)
  Top 0.127: L39.1 27.38,30.64 26.62,29.88 22.56,29.88 v21.8,29.12 | v22.17,27.85 U24.3
  Bottom 0.127: v21.8,29.12 21.8,27.85 v22.16,27.85 v22.17,27.85
N$21  (via drill 0.3)
  Top 0.127: L40.1 22.81,30.64 v22.56,30.39 | v22.56,28.36 U24.2
  Bottom 0.127: v22.56,30.39 v22.56,28.36
N$22  (via drill 0.3)
  Top 0.127: L2.1 v16.46,66.2 | v11.13,62.65 U5.2
  Bottom 0.127: v16.46,66.2 14.68,66.2 v11.13,62.65
N$23  (via drill 0.3)
  Top 0.127: U6.3 v24.09,62.14 v24.08,62.14 | v24.34,65.19 29.67,65.19 L3.1
  Bottom 0.127: v24.08,62.14 24.08,64.93 v24.34,65.19
N$24  (via drill 0.3)
  Top 0.127: U6.2 v22.31,62.64 v22.3,62.65 | v23.32,65.95 25.35,65.95 L4.1
  Bottom 0.127: v22.3,62.65 22.3,64.93 v23.32,65.95
N$25  (via drill 0.3)
  Top 0.127: U7.2 v34.5,62.64 v34.5,62.65 | v34.5,66.2 L6.1
  Bottom 0.127: v34.5,62.65 v34.5,66.2
N$26  (via drill 0.3)
  Top 0.127: U7.3 v35.77,62.14 | v36.02,65.19 41.1,65.19 L5.1
  Bottom 0.127: v35.77,62.14 35.77,64.93 v36.02,65.19
N$27  (via drill 0.3)
  Top 0.127: U8.3 v47.46,62.14 v47.45,62.14 | v47.45,65.19 52.53,65.19 L7.1
  Bottom 0.127: v47.45,62.14 v47.45,65.19
N$28  (via drill 0.3)
  Top 0.127: U8.2 v45.43,62.64 v45.42,62.65 | v45.42,65.95 48.21,65.95 L8.1
  Bottom 0.127: v45.42,62.65 v45.42,65.95
N$29  (via drill 0.3)
  Top 0.127: U9.3 58.37,62.14 v57.86,62.65 | v58.37,64.93 64.98,64.93 L9.1
  Bottom 0.127: v57.86,62.65 57.86,64.42 v58.37,64.93
N$30  (via drill 0.3)
  Top 0.127: U9.2 v59.9,62.64 v59.9,62.65 | v59.39,66.46 60.91,66.46 L10.1
  Bottom 0.127: v59.9,62.65 59.9,65.95 v59.39,66.46
N$31  (via drill 0.3)
  Top 0.127: U10.3 v71.83,62.14 | v72.85,66.2 L11.1
  Bottom 0.127: v71.83,62.14 71.83,65.19 v72.85,66.2
N$32  (via drill 0.3)
  Top 0.127: U10.2 70.06,62.64 v69.8,62.9 | v69.8,65.95 71.07,65.95 L12.1
  Bottom 0.127: v69.8,62.9 v69.8,65.95
N$33  (via drill 0.3)
  Top 0.127: U11.3 v9.86,50.71 | v9.6,55.79 18.24,55.79 L13.1
  Bottom 0.127: v9.86,50.71 9.86,55.53 v9.6,55.79
N$34  (via drill 0.3)
  Top 0.127: U11.2 12.66,51.21 v12.4,51.47 | v12.65,55.03 13.92,55.03 L14.1
  Bottom 0.127: v12.4,51.47 12.4,54.77 v12.65,55.03
N$35  (via drill 0.3)
  Top 0.127: U12.3 22.56,50.71 v21.8,51.47 | v22.05,55.53 29.92,55.53 L15.1
  Bottom 0.127: v21.8,51.47 21.8,55.28 v22.05,55.53
N$36  (via drill 0.3)
  Top 0.127: U12.2 23.07,51.21 v22.56,51.72 | v22.81,54.77 L16.1
  Bottom 0.127: v22.56,51.72 22.56,54.52 v22.81,54.77
N$37  (via drill 0.3)
  Top 0.127: U13.3 33.48,50.71 v33.23,50.96 | v32.46,55.53 41.35,55.53 L17.1
  Bottom 0.127: v33.23,50.96 33.23,54.77 v32.46,55.53
N$38  (via drill 0.3)
  Top 0.127: U13.2 34.5,51.21 v33.73,51.98 | v33.99,55.03 36.78,55.03 L18.1
  Bottom 0.127: v33.73,51.98 33.73,54.77 v33.99,55.03
N$39  (via drill 0.3)
  Top 0.127: U14.3 45.16,50.71 v44.66,51.22 | v44.66,55.53 52.78,55.53 L19.1
  Bottom 0.127: v44.66,51.22 v44.66,55.53
N$40  (via drill 0.3)
  Top 0.127: U14.2 45.61,51.21 v45.1,51.72 | L20.1 v45.16,54.77
  Bottom 0.127: v45.1,51.72 45.1,54.71 v45.16,54.77
N$41  (via drill 0.3)
  Top 0.127: L41.1 42.12,31.4 41.1,30.39 34.5,30.39 v33.99,29.88 | v34.75,28.1 36.27,28.1 36.53,27.85 U25.3
  Bottom 0.127: v33.99,29.88 33.99,28.86 v34.75,28.1
N$42  (via drill 0.3)
  Top 0.127: L42.1 33.48,31.91 v33.23,31.66 | U25.2 37.45,28.45 37.11,28.45 36.7,28.86 v33.48,28.86
  Bottom 0.127: v33.23,31.66 33.23,29.12 v33.48,28.86
N$43  (via drill 0.3)
  Top 0.127: L43.1 49.74,31.91 48.47,30.64 v44.91,30.64 | v44.66,27.59 45.42,27.59 45.67,27.85 U26.3
  Bottom 0.127: v44.91,30.64 44.91,27.85 v44.66,27.59
N$44  (via drill 0.3)
  Top 0.127: L44.1 v44.15,31.91 | v44.15,28.36 U26.2
  Bottom 0.127: v44.15,31.91 v44.15,28.36
N$45  (via drill 0.3)
  Top 0.127: L46.1 v57.36,30.64 | v57.36,28.36 U27.2
  Bottom 0.127: v57.36,30.64 v57.36,28.36
N$46  (via drill 0.3)
  Top 0.127: L45.1 62.94,30.64 62.18,29.88 58.63,29.88 v58.37,29.63 | v57.86,27.85 U27.3
  Bottom 0.127: v58.37,29.63 58.37,28.36 v57.86,27.85
N$47  (via drill 0.3)
  Top 0.127: L47.1 74.37,30.64 73.61,29.88 71.07,29.88 v70.56,29.37 | v70.31,27.85 U28.3
  Bottom 0.127: v70.56,29.37 70.56,28.1 v70.31,27.85
N$48  (via drill 0.3)
  Top 0.127: L48.1 70.06,30.64 v69.8,30.39 | v69.8,28.61 73.53,28.61 73.68,28.45 74.03,28.45 U28.2
  Bottom 0.127: v69.8,30.39 v69.8,28.61
N$49  (via drill 0.3)
  Top 0.127: U29.3 11.38,16.93 v10.87,17.43 | v11.38,19.47 18.24,19.47 L49.1
  Bottom 0.127: v10.87,17.43 10.87,18.96 v11.38,19.47
N$50  (via drill 0.3)
  Top 0.127: U29.2 12.41,17.43 v11.89,17.94 | v12.14,20.23 13.92,20.23 L50.1
  Bottom 0.127: v11.89,17.94 11.89,19.97 v12.14,20.23
N$51  (via drill 0.3)
  Top 0.127: U30.3 22.81,16.93 v22.3,17.43 | v22.3,19.47 28.4,19.47 L51.1
  Bottom 0.127: v22.3,17.43 v22.3,19.47
N$52  (via drill 0.3)
  Top 0.127: U30.2 23.33,17.43 v22.81,17.94 | v22.81,20.23 24.08,20.23 L52.1
  Bottom 0.127: v22.81,17.94 v22.81,20.23
N$53  (via drill 0.3)
  Top 0.127: U31.3 33.48,16.93 v32.97,17.43 | L53.1 40.85,19.72 40.08,18.96 33.23,18.96 v32.97,18.7
  Bottom 0.127: v32.97,17.43 v32.97,18.7
N$54  (via drill 0.3)
  Top 0.127: U31.2 34.25,17.43 v33.99,17.69 | v33.99,20.48 L54.1
  Bottom 0.127: v33.99,17.69 v33.99,20.48
N$55  (via drill 0.3)
  Top 0.127: U32.3 45.93,16.93 v45.16,17.69 | v45.42,19.21 52.28,19.21 L55.1
  Bottom 0.127: v45.16,17.69 45.16,18.96 v45.42,19.21
N$56  (via drill 0.3)
  Top 0.127: U32.2 46.44,17.43 v45.93,17.94 | v45.67,20.74 46.94,20.74 L56.1
  Bottom 0.127: v45.93,17.94 45.93,20.48 v45.67,20.74
N$57  (via drill 0.3)
  Top 0.127: U33.3 57.61,17.43 v57.36,17.69 | v57.61,19.21 64.98,19.21 L57.1
  Bottom 0.127: v57.36,17.69 57.36,18.96 v57.61,19.21
N$58  (via drill 0.3)
  Top 0.127: U33.2 58.63,17.93 v58.37,18.2 | v57.86,20.74 59.64,20.74 L58.1
  Bottom 0.127: v58.37,18.2 58.37,20.23 v57.86,20.74
N$59  (via drill 0.3)
  Top 0.127: U34.3 70.56,17.43 v70.31,17.69 | v70.31,18.96 70.82,19.47 77.93,19.47 L59.1
  Bottom 0.127: v70.31,17.69 v70.31,18.96
N$60  (via drill 0.3)
  Top 0.127: U34.2 72.1,17.93 v71.33,18.7 | v70.56,20.48 L60.1
  Bottom 0.127: v71.33,18.7 71.33,19.72 v70.56,20.48
N$61
  pour Top (isolate 0.254): 0.21,73.57 9.1,73.57 9.1,82.46 82.76,82.46 82.76,73.57 91.65,73.57 91.65,-0.09 0.21,-0.09
N$62
  pour Bottom (isolate 0.254): 0.21,-0.09 91.65,-0.09 91.65,72.3 81.49,72.3 81.49,81.19 10.37,81.19 10.37,72.3 0.21,72.3
T1+  (via drill 0.3)
  Top 0.127: L1.2 v20.27,68.23 | v20.53,78.65 J$2.12
  Bottom 0.127: v20.27,68.23 20.27,78.39 v20.53,78.65
T1-  (via drill 0.3)
  Top 0.127: L2.2 18.49,68.23 v19.51,69.25 | v19.51,80.43 26.11,80.43 J$2.11
  Bottom 0.127: v19.51,69.25 19.51,75.35 18.49,76.36 18.49,79.41 v19.51,80.43
T2+  (via drill 0.3)
  Top 0.127: L3.2 30.69,69.5 29.92,70.27 22.17,70.27 v21.16,71.28 | v22.81,76.11 29.31,76.11 J$2.10
  Bottom 0.127: v21.16,71.28 21.16,74.45 v22.81,76.11
T2-  (via drill 0.3)
  Top 0.127: L4.2 25.61,69.25 25.1,69.76 21.48,69.76 v20.71,70.52 | v21.29,75.35 32.51,75.35 J$2.9
  Bottom 0.127: v20.71,70.52 20.71,74.77 v21.29,75.35
T3+  (via drill 0.3)
  Top 0.127: L5.2 41.98,68.23 41.03,69.18 38.63,69.18 v38.31,69.5
  Bottom 0.127: v38.31,69.5 38.31,72.55 37.8,73.06 37.8,76.67 J$2.8
T3-  (via drill 0.3)
  Top 0.127: L6.2 40.34,68.23 v40.85,68.74
  Bottom 0.127: v40.85,68.74 40.85,72.04 41.61,72.81 41.61,76.51 J$2.7
T4+  (via drill 0.3)
  Top 0.127: L7.2 52.78,68.23 51.77,69.25 49.99,69.25 v49.74,69.5
  Bottom 0.127: v49.74,69.5 49.74,76.62 J$2.6
T4-  (via drill 0.3)
  Top 0.127: L8.2 51.26,68.23 v51.51,67.98
  Bottom 0.127: v51.51,67.98 51.51,70.27 53.55,72.3 53.55,76.77 J$2.5
T5+  (via drill 0.3)
  Top 0.127: L9.2 66.25,69.25 65.74,69.76 v57.86,69.76
  Bottom 0.127: v57.86,69.76 57.86,76.41 J$2.4
T5-  (via drill 0.3)
  Top 0.127: L10.2 v62.94,68.23
  Bottom 0.127: v62.94,68.23 62.94,71.03 61.42,72.55 61.42,76.82 J$2.3
T6+  (via drill 0.3)
  Top 0.127: L11.2 v72.85,68.23 | v71.33,75.6 66.6,75.6 J$2.2
  Bottom 0.127: v72.85,68.23 72.85,74.08 v71.33,75.6
T6-  (via drill 0.3)
  Top 0.127: L12.2 70.06,68.23 v69.55,68.74
  Bottom 0.127: v69.55,68.74 69.55,76.62 J$2.1
T7+  (via drill 0.3)
  Top 0.127: L13.2 18.75,56.8 v17.73,57.82 | v18.24,73.57 J$3.12
  Bottom 0.127: v17.73,57.82 17.73,73.06 v18.24,73.57
T7-  (via drill 0.3)
  Top 0.127: L14.2 16.46,56.8 v16.97,57.31 | v16.46,71.54 16.97,71.54 17.48,72.04 26.37,72.04 J$3.11
  Bottom 0.127: v16.97,57.31 16.97,61.59 17.29,61.9 17.29,70.71 v16.46,71.54
T8+  (via drill 0.3)
  Top 0.127: L15.2 32.21,56.8 v32.46,57.06
  Bottom 0.127: v32.46,57.06 32.46,72.96 J$3.10
T8-  (via drill 0.3)
  Top 0.127: L16.2 v28.4,56.8 | v29.42,71.54 33.78,71.54 J$3.9
  Bottom 0.127: v28.4,56.8 28.4,61.59 28.72,61.9 28.72,70.84 v29.42,71.54
T9+  (via drill 0.3)
  Top 0.127: L17.2 42.12,57.82 41.61,58.33 v38.81,58.33
  Bottom 0.127: v38.81,58.33 38.81,72.6 J$3.8
T9-  (via drill 0.3)
  Top 0.127: L18.2 40.59,56.8 v40.85,57.06
  Bottom 0.127: v40.85,57.06 40.85,65.95 42.62,67.73 42.62,72.45 J$3.7
T10+  (via drill 0.3)
  Top 0.127: L19.2 53.55,57.82 52.53,58.84 44.91,58.84 v44.66,58.58 | v43.64,71.54 45.67,71.54 J$3.6
  Bottom 0.127: v44.66,58.58 44.66,62.03 44.4,62.29 44.4,70.77 v43.64,71.54
T10-  (via drill 0.3)
  Top 0.127: L20.2 v45.42,56.8 | v45.16,71.03 49.13,71.03 J$3.5
  Bottom 0.127: v45.42,56.8 45.42,61.63 44.66,62.39 44.66,70.52 v45.16,71.03
T11+  (via drill 0.3)
  Top 0.127: L21.2 66.25,58.07 65.99,58.33 57.86,58.33 v57.36,57.82
  Bottom 0.127: v57.36,57.82 57.36,71.84 J$3.4
T11-  (via drill 0.3)
  Top 0.127: L22.2 61.17,56.8 v61.42,57.06
  Bottom 0.127: v61.42,57.06 61.42,71.74 J$3.3
T12+  (via drill 0.3)
  Top 0.127: L23.2 78.95,57.31 77.93,58.33 68.02,58.33 v67.52,58.84
  Bottom 0.127: v67.52,58.84 67.52,69.61 J$3.2
T12-  (via drill 0.3)
  Top 0.127: L24.2 69.55,56.8 v69.04,57.31
  Bottom 0.127: v69.04,57.31 69.04,72.04 J$3.1
T13+  (via drill 0.3)
  Top 0.127: L25.2 19.26,45.63 21.54,47.91 83.52,47.91 87.33,51.72 87.52,51.72 v87.58,51.79
  Bottom 0.127: v87.58,51.79 87.39,51.98 87.2,51.98 86.31,52.87 86.31,55.94 J$4.12
T13-
  Top 0.127: L26.2 15.45,45.63 17.99,48.17 82.5,48.17 J$4.11
T14+  (via drill 0.3)
  Top 0.127: L27.2 31.45,47.41 83.01,47.41 v84.28,46.14
  Bottom 0.127: v84.28,46.14 84.43,46.14 J$4.10
T14-
  Top 0.127: L28.2 25.86,45.37 28.15,47.66 85.75,47.66 J$4.9
T15+  (via drill 0.3)
  Top 0.127: L29.2 42.88,45.37 44.4,46.9 80.22,46.9 v83.26,43.85
  Bottom 0.127: v83.26,43.85 85.6,43.85 J$4.8
T15-  (via drill 0.3)
  Top 0.127: L30.2 37.8,45.37 39.58,47.15 81.49,47.15 v82.5,46.14 | v83.52,36.99 87.18,36.99 J$4.7
  Bottom 0.127: v82.5,46.14 82.5,38.01 v83.52,36.99
T16+  (via drill 0.3)
  Top 0.127: L31.2 54.05,45.37 55.07,46.39 79.21,46.39 79.64,45.96 79.64,45.95 v80.22,45.37 | v79.45,34.2 87.33,34.2 J$4.6
  Bottom 0.127: v80.22,45.37 80.22,34.97 v79.45,34.2
T16-  (via drill 0.3)
  Top 0.127: L32.2 47.7,45.37 48.97,46.64 79.84,46.64 v80.66,45.82 | v81.49,29.63 87.73,29.63 J$4.5
  Bottom 0.127: v80.66,45.82 80.66,30.45 v81.49,29.63
T17+  (via drill 0.3)
  Top 0.127: L33.2 71.31,45.37 72.01,44.67 80.66,44.67 v81.49,43.85 | v82.25,25.82 87.78,25.82 J$4.4
  Bottom 0.127: v81.49,43.85 81.49,39.53 82.25,38.77 v82.25,25.82
T17-  (via drill 0.3)
  Top 0.127: L34.2 63.45,45.37 v63.71,45.12 | v65.23,36.3 85.48,36.3 v85.8,35.98
  Bottom 0.127: v63.71,45.12 63.71,41.82 64.21,41.31 64.21,39.58 64.28,39.51 64.28,39.47 64.47,39.28 64.47,37.06 v65.23,36.3 | v85.8,35.98 85.8,23.83 J$4.3
T18+  (via drill 0.3)
  Top 0.127: L35.2 78.18,45.37 v77.93,45.12 | v79.45,42.07 83.77,42.07 v84.28,41.56 | v84.28,17.94 87.73,17.94 J$4.2
  Bottom 0.127: v77.93,45.12 77.93,43.6 v79.45,42.07 | v84.28,41.56 v84.28,17.94
T18-  (via drill 0.3)
  Top 0.127: L36.2 77.17,45.37 v77.42,45.63 | v79.2,35.47 84.79,35.47 v85.3,34.96
  Bottom 0.127: v77.42,45.63 77.42,43.34 79.96,40.8 79.96,36.23 v79.2,35.47 | v85.3,34.96 85.3,16.42 J$4.1
T19+  (via drill 0.3)
  Top 0.127: L37.2 20.78,30.64 v21.29,30.13 | v21.03,11.34 21.03,10.73 J$5.12
  Bottom 0.127: v21.29,30.13 21.29,19.47 20.02,18.2 20.02,12.35 v21.03,11.34
T19-  (via drill 0.3)
  Top 0.127: L38.2 16.21,32.67 v17.73,31.15
  Bottom 0.127: v17.73,31.15 17.73,13.62 J$5.11
T20+  (via drill 0.3)
  Top 0.127: L39.2 28.5,32.67 28.25,32.42 27.89,32.42 v27.13,31.66
  Bottom 0.127: v27.13,31.66 27.13,17.22 27.07,17.16 27.07,8.75 | 27.07,8.75 27.07,8.74 | J$5.10 26.86,8.54 27.07,8.75
T20-  (via drill 0.3)
  Top 0.127: L40.2 28.15,32.67 v29.67,34.2
  Bottom 0.127: v29.67,34.2 29.67,9.61 J$5.9
T21+  (via drill 0.3)
  Top 0.127: L41.2 41.35,33.94 40.59,34.71 35.77,34.71 v34.5,33.44 | v37.29,11.34 35,11.34 34.5,10.83 34.5,8.75 J$5.8
  Bottom 0.127: v34.5,33.44 34.5,29.88 35.77,28.61 35.77,12.86 v37.29,11.34
T21-  (via drill 0.3)
  Top 0.127: L42.2 38.56,33.94 v39.58,32.93
  Bottom 0.127: v39.58,32.93 39.58,28.65 39.01,28.08 39.01,28.04 38.56,27.59 38.56,24.66 37.99,24.09 37.99,9.22 J$5.7
T22+  (via drill 0.3)
  Top 0.127: L43.2 50.5,33.94 49.99,34.45 48.47,34.45 47.96,34.96 44.91,34.96 v44.66,34.71
  Bottom 0.127: v44.66,34.71 44.66,33.94 43.39,32.67 43.39,9.31 J$5.6
T22-  (via drill 0.3)
  Top 0.127: L44.2 48.97,33.94 v49.48,33.44 | v49.74,10.83 47.2,10.83 46.69,10.32 46.69,8.65 J$5.5
  Bottom 0.127: v49.48,33.44 49.48,11.08 v49.74,10.83
T23+  (via drill 0.3)
  Top 0.127: L45.2 67.01,32.67 64.98,34.71 55.58,34.71 v54.82,35.47 | v53.29,10.83 52.83,10.83 J$5.4
  Bottom 0.127: v54.82,35.47 54.82,12.35 v53.29,10.83
T23-  (via drill 0.3)
  Top 0.127: L46.2 55.58,32.67 v55.32,32.42
  Bottom 0.127: v55.32,32.42 55.32,9.36 J$5.3
T24+  (via drill 0.3)
  Top 0.127: L47.2 77.17,32.67 76.15,33.69 67.78,33.69 66.51,34.96 62.44,34.96 v61.67,35.72
  Bottom 0.127: v61.67,35.72 61.67,25.56 60.66,24.55 60.66,10.73 J$5.2
T24-  (via drill 0.3)
  Top 0.127: L48.2 69.55,32.67 v69.29,32.42 | v67.26,10.07 63.96,10.07 J$5.1
  Bottom 0.127: v69.29,32.42 69.29,29.37 67.52,27.59 67.52,10.32 v67.26,10.07
T25+  (via drill 0.3)
  Top 0.127: L49.2 21.8,22.51 v23.32,24.04 | v24.84,3.97 29.52,3.97 J$6.12
  Bottom 0.127: v23.32,24.04 23.32,22.51 24.34,21.5 24.34,4.48 v24.84,3.97
T25-  (via drill 0.3)
  Top 0.127: L50.2 16.97,22.51 17.73,23.28 21.93,23.28 23.46,24.8 31.96,24.8 v32.97,25.82
  Bottom 0.127: v32.97,25.82 32.97,20.74 31.7,19.47 31.7,10.83 32.72,9.81 32.72,4.73 J$6.11
T26+  (via drill 0.3)
  Top 0.127: L51.2 33.48,22.51 v33.73,22.26
  Bottom 0.127: v33.73,22.26 33.73,21.75 34.75,20.74 34.75,12.1 36.53,10.32 36.53,4.89 J$6.10
T26-  (via drill 0.3)
  Top 0.127: L52.2 24.34,23.78 25.1,24.55 38.56,24.55 v38.81,24.29
  Bottom 0.127: v38.81,24.29 38.81,17.69 39.32,17.18 39.32,11.08 40.59,9.81 40.59,4.78 J$6.9
T27+  (via drill 0.3)
  Top 0.127: L53.2 v43.89,22.51
  Bottom 0.127: v43.89,22.51 43.89,9.56 44.91,8.54 44.91,4.43 J$6.8
T27-  (via drill 0.3)
  Top 0.127: L54.2 36.78,22.51 37.8,23.53 v45.67,23.53
  Bottom 0.127: v45.67,23.53 45.67,21.36 44.72,20.41 44.72,15.34 48.47,11.59 48.47,4.84 J$6.7
T28+  (via drill 0.3)
  Top 0.127: L55.2 v51.01,22.51
  Bottom 0.127: v51.01,22.51 51.01,17.48 52.07,16.41 52.07,5.19 J$6.6
T28-  (via drill 0.3)
  Top 0.127: L56.2 48.97,24.29 54.56,24.29 v55.83,23.02
  Bottom 0.127: v55.83,23.02 55.83,9.81 56.59,9.05 56.59,4.63 J$6.5
T29+  (via drill 0.3)
  Top 0.127: L57.2 66.25,23.02 64.47,24.8 61.93,24.8 v61.67,24.55
  Bottom 0.127: v61.67,24.55 61.67,11.34 60.91,10.58 60.91,4.28 J$6.4
T29-  (via drill 0.3)
  Top 0.127: L58.2 v63.96,22.51
  Bottom 0.127: v63.96,22.51 63.96,17.99 64.28,17.67 64.28,17.63 64.72,17.18 64.72,4.43 J$6.3
T30+  (via drill 0.3)
  Top 0.127: L59.2 78.95,23.78 77.93,24.8 69.55,24.8 v69.29,24.55
  Bottom 0.127: v69.29,24.55 69.29,17.88 69.53,17.64 69.53,17.23 69.4,17.09 J$6.2
T30-  (via drill 0.3)
  Top 0.127: L60.2 v75.14,22.51
  Bottom 0.127: v75.14,22.51 75.14,5.5 J$6.1
TEMP  (via drill 0.3)
  Top 0.127: 70.22,12.52 69.62,13.12 7.83,13.12 5.17,15.77 5.17,15.78 4.82,16.12 U3.1 5.95,17.69 v7.32,17.69 | 70.22,12.52 U2.1 | 70.22,12.52 72.5,12.52 73.36,13.37 85.8,13.37 v88.34,10.83 | v89.87,64.93 84.94,64.93 83.23,63.22 | 83.23,63.22 U1.1 | U4.1 13.27,79.01 15.45,81.19 77.42,81.19 v78.95,79.66 | v79.96,63.15 83.16,63.15 83.23,63.22
  Bottom 0.127: J$1.5 5.15,36.11 7.32,33.94 v7.32,17.69 | v88.34,10.83 90.38,12.86 90.38,64.42 v89.87,64.93 | v78.95,79.66 78.95,74.58 77.42,73.06 77.42,65.69 v79.96,63.15